# EAGLE board Adafruit_ADS1015_12Bit_I2C_ADC (EAGLE 6.2)
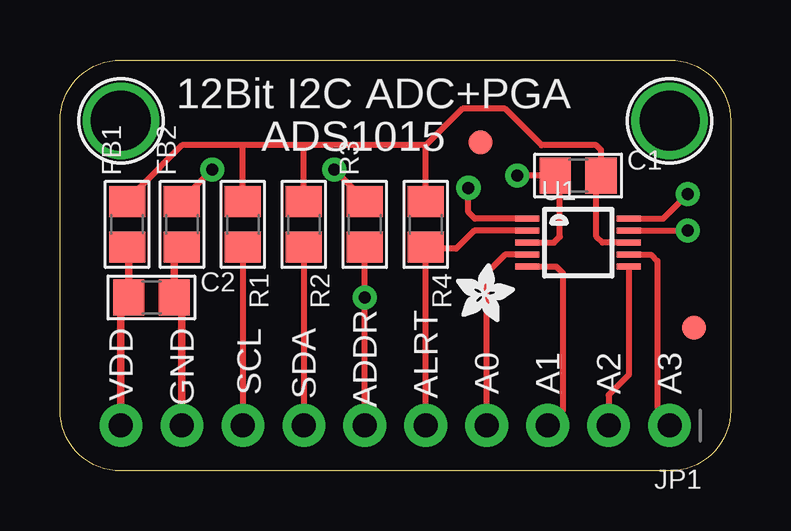
[diagram p0: board, top side]
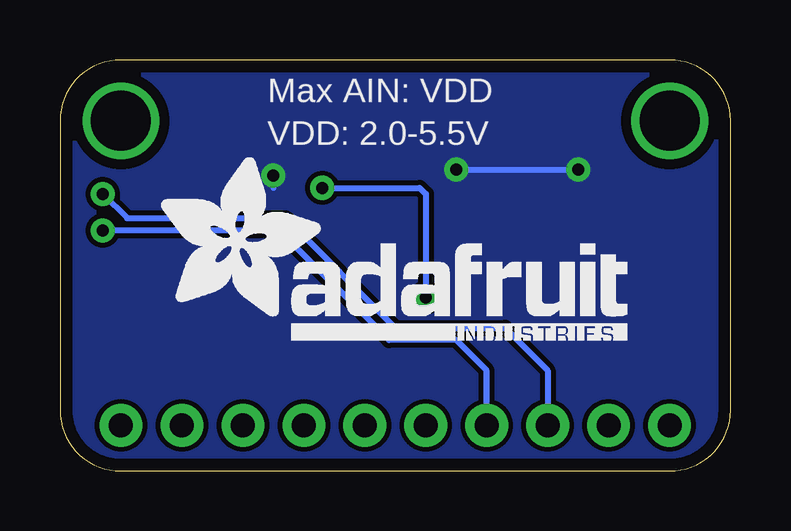
[diagram p1: board, bottom side, seen from below]

Size 27.94 x 17.14 mm. Coordinates in mm from the lower left corner, seen from the top.
Outline: 27.94,14.61 27.94,2.54 arc-90 25.4,0 2.54,0 arc-90 0,2.54 0,14.61 arc-90 2.54,17.14 25.4,17.14 arc-90 27.94,14.61
Copper layers (1*16): Top 0.035mm / dielectric 1.5mm / Bottom 0.035mm
Design rules: minimum track width 8mil, minimum drill 0.4mm, track to track 8mil, track to pad 8mil, pad to pad 8mil, via to via 8mil, smd to smd 8mil, copper to edge 20mil, drill to drill 8mil, minimum pad ring 8mil, minimum via ring 10mil, stop-mask expansion 3mil, vias tented up to drill 20mil, thermal gap 8mil

## Footprints (pad centres in the part's own frame; a part is rotated, then mirrored left to right if it is on the bottom)
0805 = smd 1.3 x 1.5: 1 -0.95,0; 2 0.95,0
FIDUCIAL_1MM = smd 1 x 1: 1 0,0
1X10_ROUND70 = drill 1 pad 1.778: 1 -11.43,0; 2 -8.89,0; 3 -6.35,0; 4 -3.81,0; 5 -1.27,0; 6 1.27,0; 7 3.81,0; 8 6.35,0; 9 8.89,0; 10 11.43,0
MSOP10 = smd 0.25 x 1: 1 -1,-2.113; 2 -0.5,-2.113; 3 0,-2.113; 4 0.5,-2.113; 5 1,-2.113; 6 1,2.113; 7 0.5,2.113; 8 0,2.113; 9 -0.5,2.113; 10 -1,2.113
MOUNTINGHOLE_2.5_PLATED = drill 2.5 pad 3.2: P$1 0,0

## Placement (x,y rotation side)
C1  10µF  [0805]  21.59,12.32 0 top
C2  10µF  [0805]  3.81,7.24 0 top
FB1  FERRITE  [0805]  2.79,10.29 90 top
FB2  FERRITE  [0805]  5.08,10.29 90 top
FID1  FIDUCIAL""  [FIDUCIAL_1MM]  26.42,5.97 180 top
FID2  FIDUCIAL""  [FIDUCIAL_1MM]  17.53,13.72 180 top
JP1  [1X10_ROUND70]  13.97,1.91 180 top
R1  10K  [0805]  7.62,10.29 270 top
R2  10K  [0805]  10.16,10.29 270 top
R3  10K  [0805]  12.7,10.29 90 top
R4  10K  [0805]  15.24,10.29 270 top
U1  ADS1015IDGST  [MSOP10]  21.59,9.53 270 top
U$13  MOUNTINGHOLE2.5  [MOUNTINGHOLE_2.5_PLATED]  25.4,14.61 180 top
U$14  MOUNTINGHOLE2.5  [MOUNTINGHOLE_2.5_PLATED]  2.54,14.61 180 top
U$15  [ADAFRUIT_TEXT_20MM]  23.88,5.46 0 bottom
U$16  [ADAFRUIT_2.5MM]  16.51,6.22 0 top

## Library data of the parts
C1 C2 FB1 FB2 FID1 FID2 JP1 R1-R4 U1 U$13-U$16 = microbuilder

## Nets
ADDR: JP1.6 R3.1 U1.1
AIN0: JP1.4 U1.4
AIN1: JP1.3 U1.5
AIN2: JP1.2 U1.6
AIN3: JP1.1 U1.7
ALERT: JP1.5 R4.2 U1.2
GND: C1.1 FB2.2 R3.2 U1.3
N$1: C2.1 FB1.1 JP1.10
N$2: C2.2 FB2.1 JP1.9
SCL: JP1.8 R1.2 U1.10
SDA: JP1.7 R2.2 U1.9
VDD: C1.2 FB1.2 R1.1 R2.1 R4.1 U1.8

## Tracks (layer width: path | path; a pad name or v marks a point on that pad's centre or on a via)
ADDR  (via drill 0.5)
  Top 0.254: U1.1 17.29,10.53 17.02,10.79 v17.02,11.81 | JP1.6 v12.7,7.24 R3.1
  Bottom 0.254: v17.02,11.81 12.95,11.81 12.7,11.56 v12.7,7.24
AIN0
  Top 0.254: U1.4 18.55,9.03 17.78,8.26 JP1.4
AIN1
  Top 0.254: U1.5 20.68,8.53 20.95,8.26 20.95,2.54 JP1.3
AIN2
  Top 0.254: U1.6 23.7,4.02 22.86,3.17 JP1.2
AIN3
  Top 0.254: U1.7 24.63,9.03 24.89,8.76 24.89,2.67 JP1.1
ALERT
  Top 0.254: JP1.5 R4.2 15.31,9.27 16.51,9.27 17.26,10.03 U1.2
GND  (via drill 0.5)
  Top 0.254: FB2.2 5.08,11.3 v6.35,12.57 | R3.2 12.7,11.3 v11.43,12.57 | v19.05,12.32 C1.1 20.83,12.13 20.83,9.78 20.57,9.53 U1.3
  Bottom 0.254: v11.43,12.57 v6.35,12.57 | v19.05,12.32 19.05,11.81
  pour Bottom: 27.94,17.14 27.94,0 0,0 0,17.14
N$1
  Top 0.305: JP1.10 2.54,6.92 C2.1 2.86,9.27 FB1.1
N$2
  Top 0.305: JP1.9 5.08,6.92 C2.2 4.76,9.02 FB2.1
SCL  (via drill 0.5)
  Top 0.254: U1.10 25.13,10.53 v26.16,11.56 | R1.2 JP1.8
  Bottom 0.254: v26.16,11.56 25.15,10.54 18.54,10.54 13.97,5.97 9.4,5.97 7.62,4.19 JP1.8
SDA  (via drill 0.5)
  Top 0.254: U1.9 26.15,10.03 v26.16,10.03 | R2.2 JP1.7
  Bottom 0.254: JP1.7 10.16,4.19 11.43,5.46 14.22,5.46 18.8,10.03 v26.16,10.03
VDD
  Top 0.254: U1.8 22.61,9.53 22.35,9.78 22.35,12.13 C1.2 | 15.24,13.59 10.16,13.59 | 10.16,13.59 7.62,13.59 | R1.1 7.62,13.59 | R2.1 10.16,13.59 | 7.62,13.59 5.08,13.59 3.3,11.81 3.3,11.75 FB1.2 | R4.1 15.24,13.59 | 15.24,13.59 16.76,15.11 18.54,15.11 20.07,13.59 22.35,13.59 22.54,13.4 C1.2 | 22.79,12.07 C1.2

## Text on the board
tPlace: 12Bit I2C ADC+PGA | ADS1015 | ADDR | ALRT | VDD | GND | SCL | SDA | A0 | A1 | A2 | A3
bPlace: Max AIN: VDD | VDD: 2.0-5.5V